# Altium PCB Bluebird_v1.0.PcbDoc
Units mil, origin at the board's own origin, x right, y up, seen from the top; angles counter-clockwise.
Board outline 2755.91 x 2204.72 mil, 4 copper layers (Top Layer, Internal Plane 1, Internal Plane 2, Bottom Layer), stack 30.634 mil thick; 136 components, 80 nets, 678 pads, 161 vias.
Unrouted connection lines stored in the file: 17.
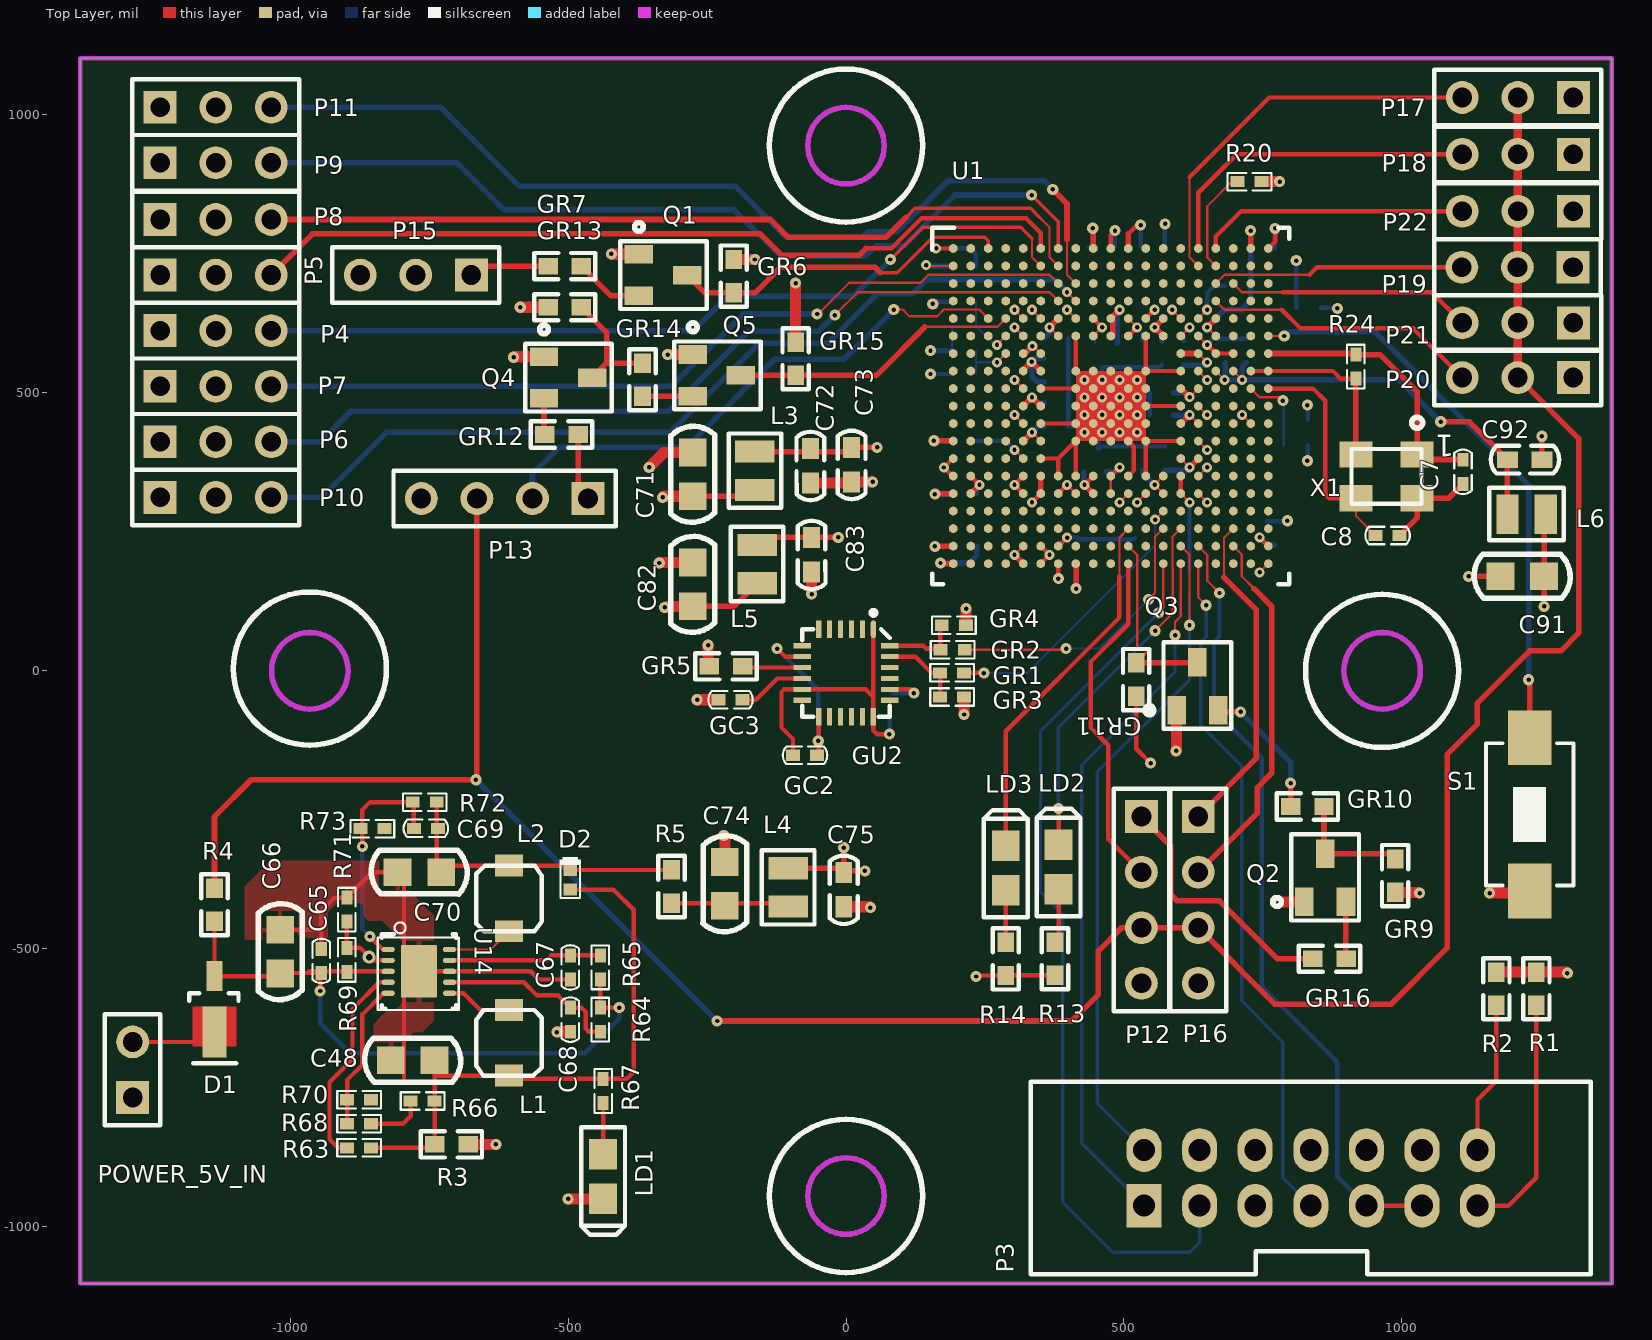
[diagram p0: Top Layer view]
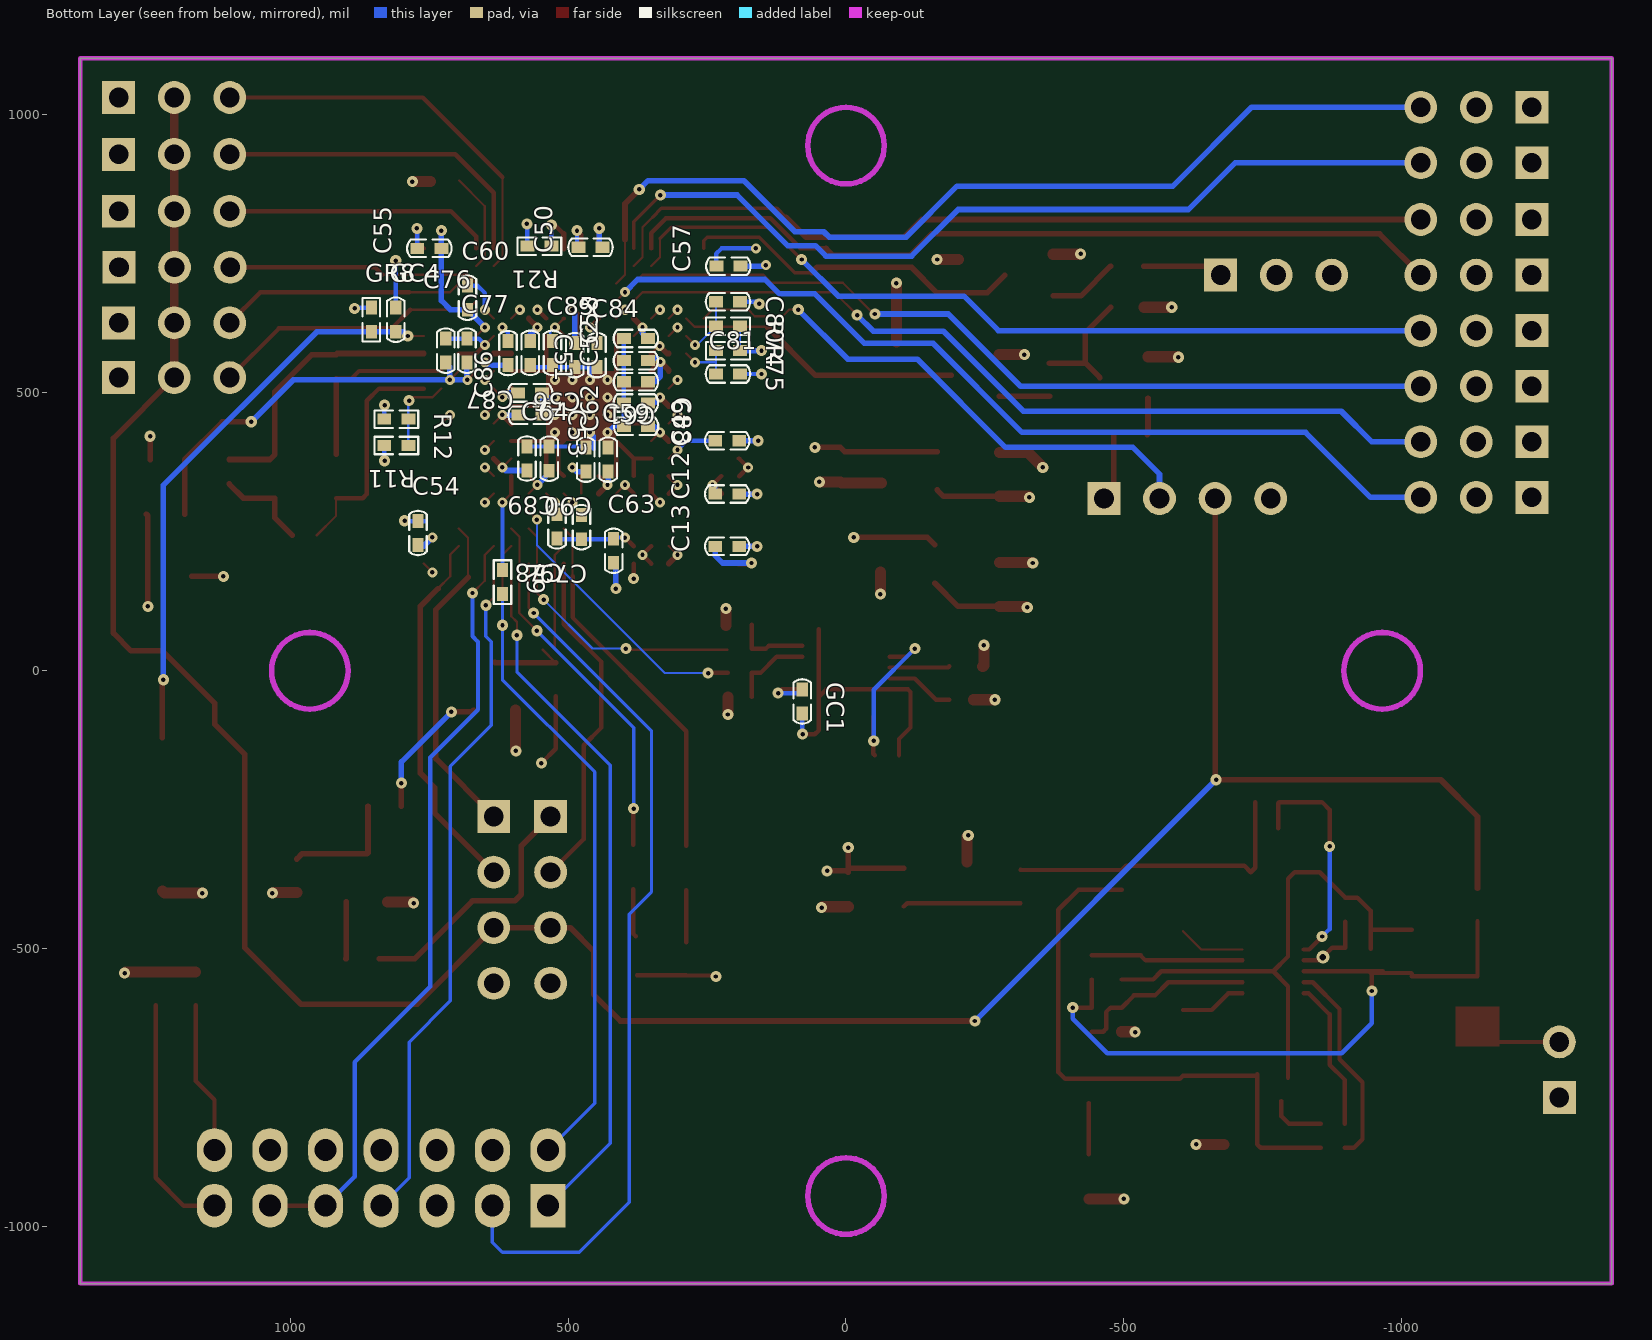
[diagram p1: Bottom Layer view, seen from below]
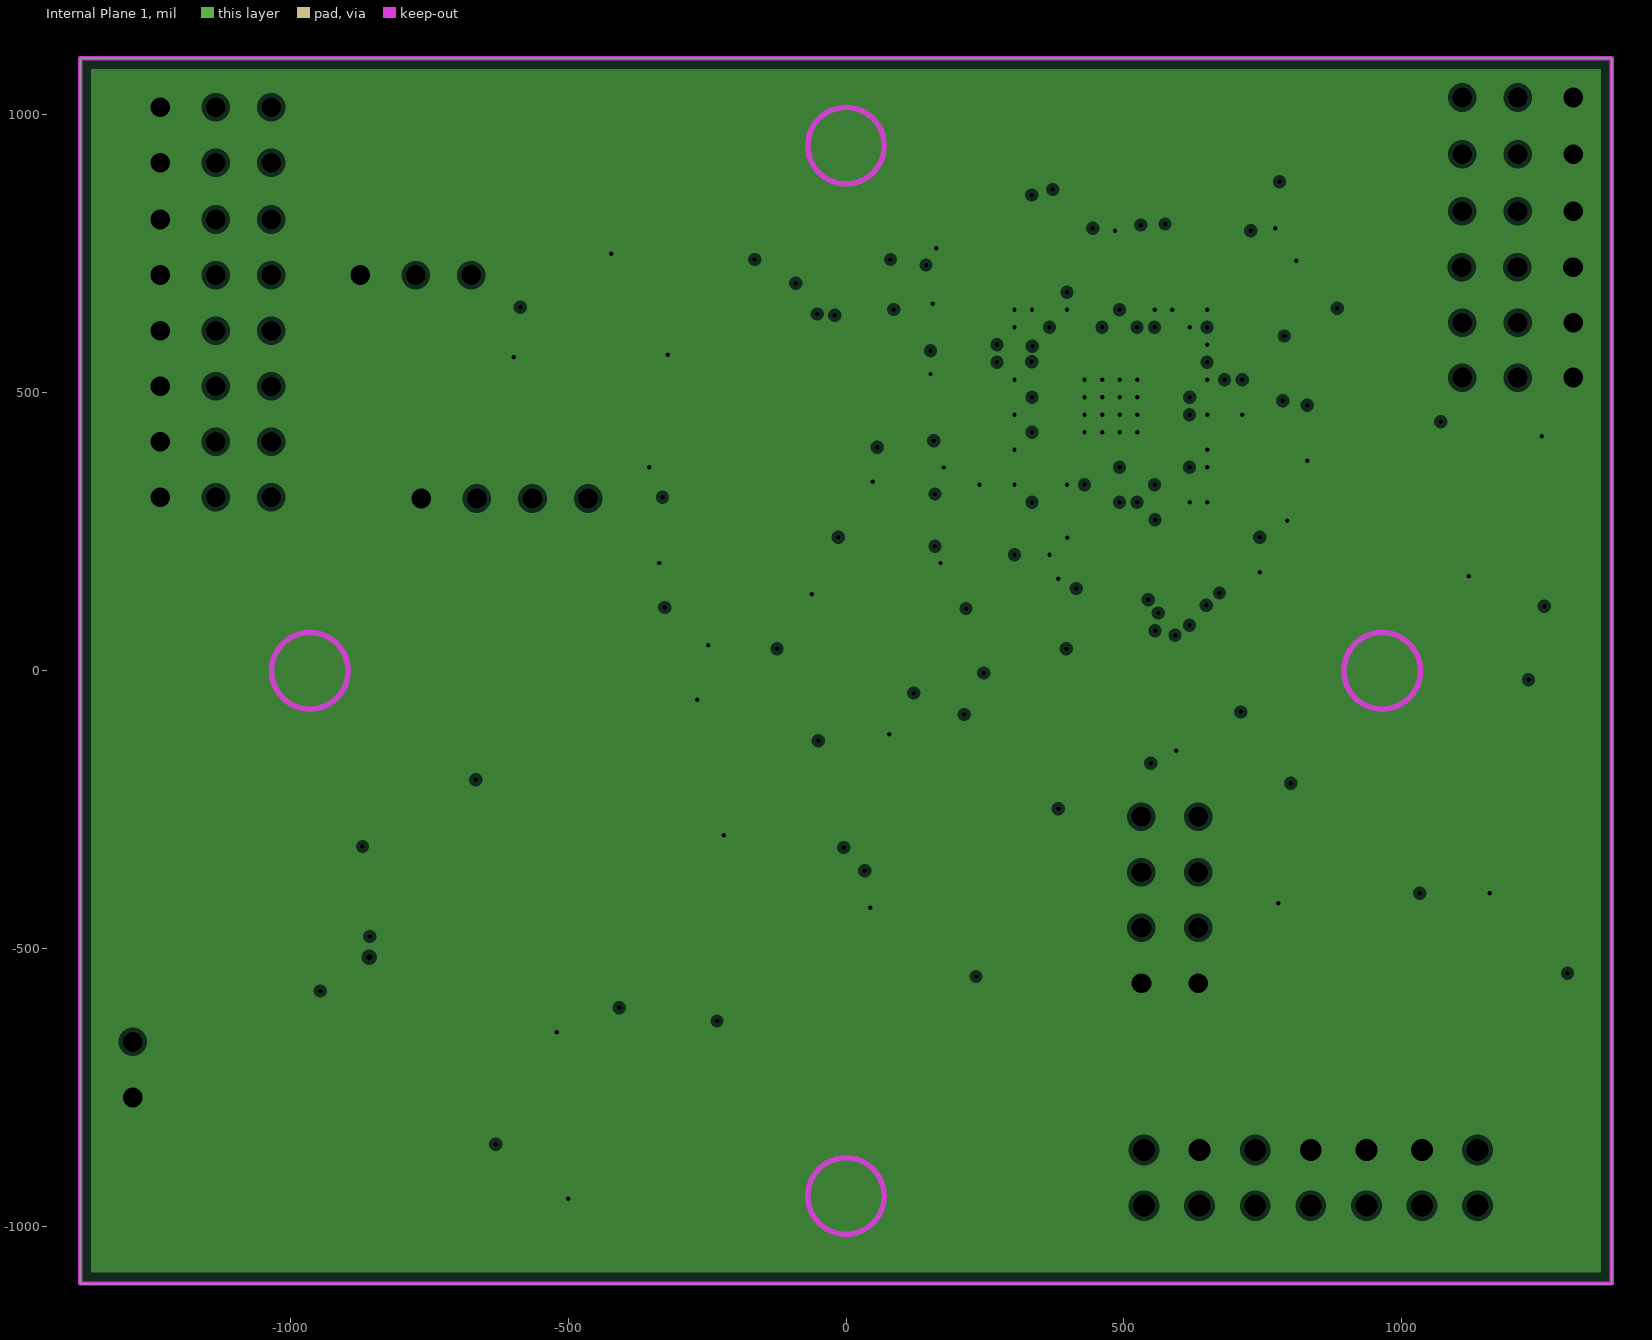
[diagram p2: Internal Plane 1, clearances drawn from the general rule]
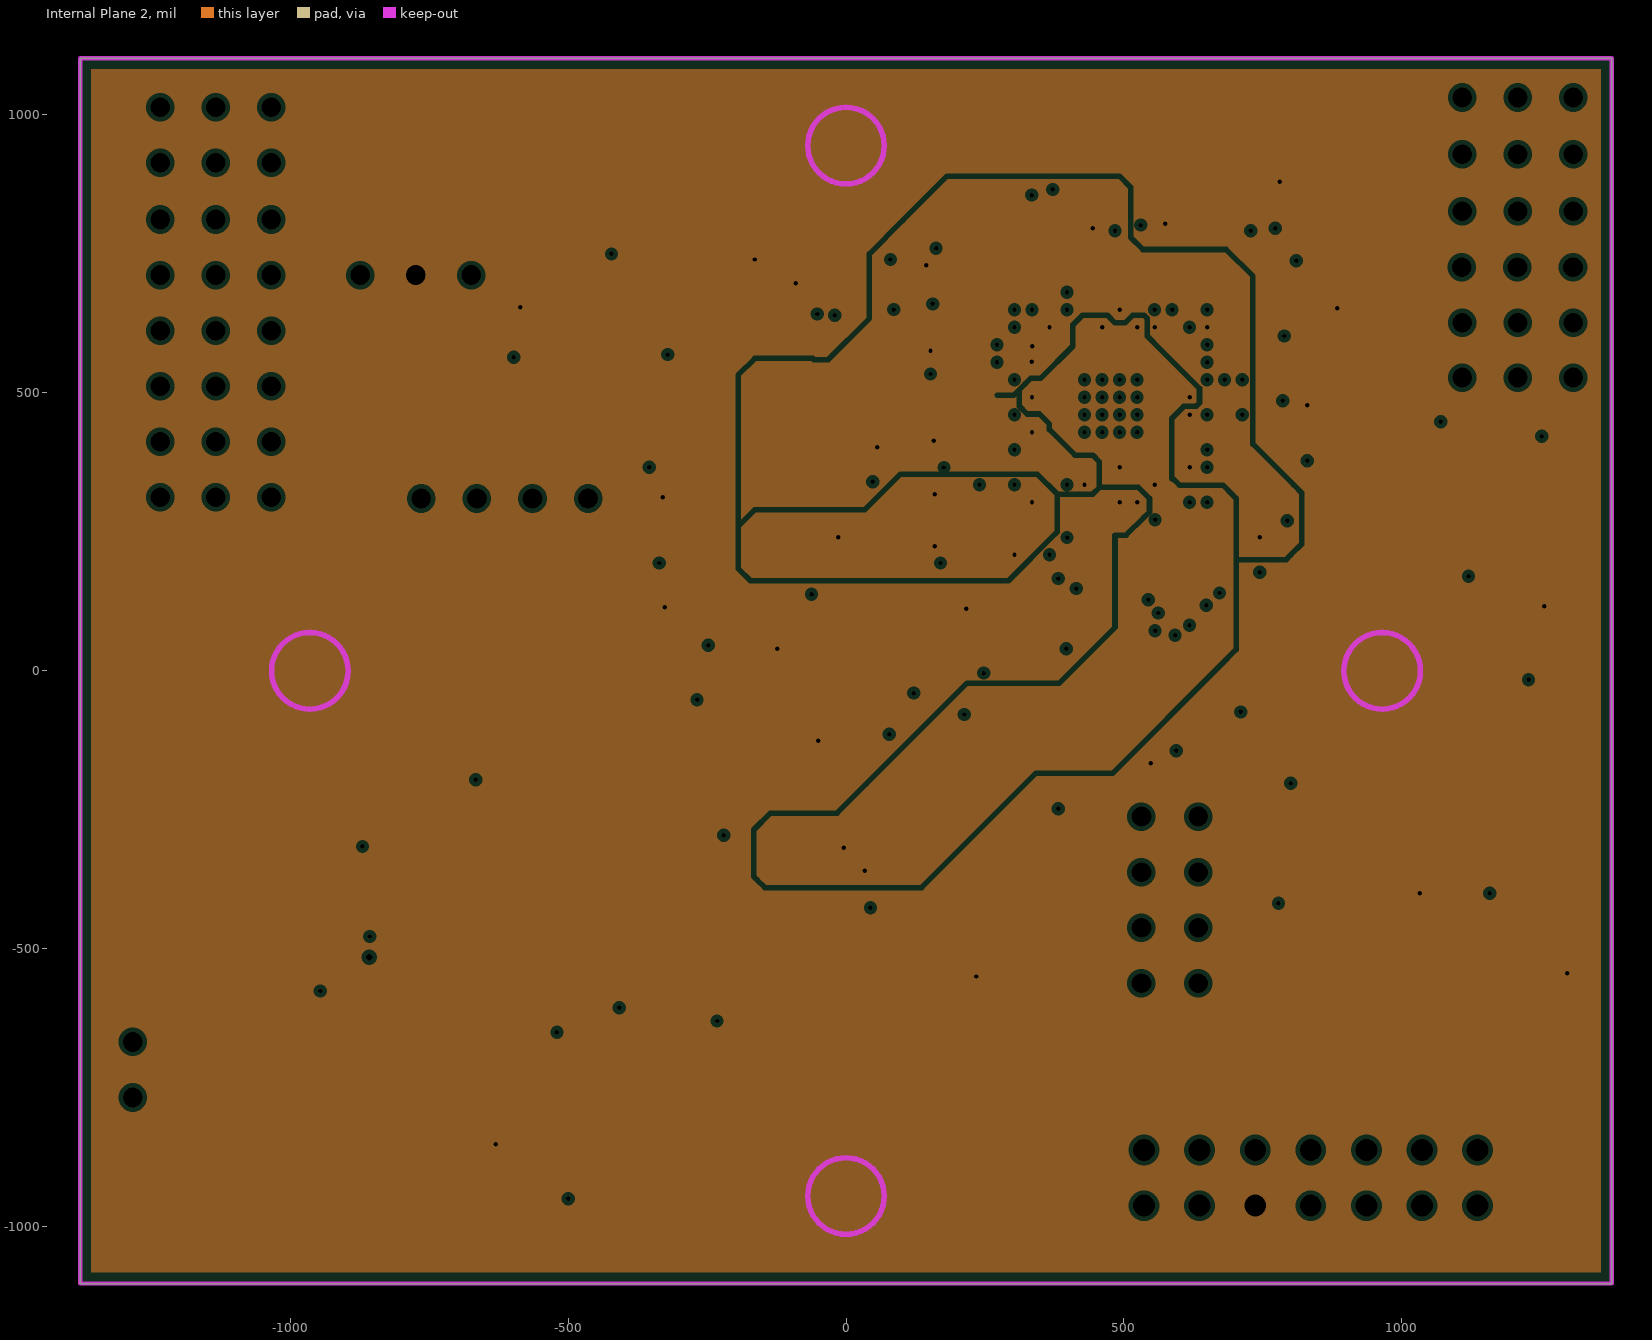
[diagram p3: Internal Plane 2, clearances drawn from the general rule]

## Layer stack, top to bottom
Top Solder: solder mask 0.4, Solder Resist, Dk 3.5
Top Layer: signal copper 1.4
Dielectric 1: core 10, FR-4, Dk 4.2
Internal Plane 1: plane copper 1.417, net GND
Dielectric 3: prepreg 5, Dk 4.2
Internal Plane 2: plane copper 1.417, net (Multiple Nets)
Dielectric 2: core 10, Dk 4.2
Bottom Layer: signal copper 1.4
Bottom Solder: solder mask 0.4, Solder Resist, Dk 3.5

## Board outline
-1377.95,-1102.36 1377.95,-1102.36 1377.95,1102.36 -1377.95,1102.36

## Design rules (kind name [scope] priority, off if disabled: settings)
Clearance [All] p1: gap=5
ComponentClearance [All] p1 off: gap=10 collisioncheckmode=3 verticalgap=10 showdistances=FALSE
PlaneClearance [All] p1: clearance=8
PlaneConnect [All] p1: planeconnectstyle=Relief reliefexpansion=10 reliefentries=4 reliefconductorwidth=8 reliefairgap=8
PolygonConnect [All] p1: connectstyle=Relief reliefconductorwidth=8 reliefentries=4 polygonreliefangle="90 Angle" airgapwidth=8
RoomDefinition Sheet6 [InComponentClass('Sheet6')] p1 off: confinementstyle=ConfineIn formatcopy=TRUE lockcomponents=FALSE outline -3617.95,-2617.68 -1617.95,-2617.68 -1617.95,-1617.68 -3617.95,-1617.68
RoomDefinition Sheet5 [InComponentClass('Sheet5')] p2 off: confinementstyle=ConfineIn formatcopy=TRUE lockcomponents=FALSE outline -3617.95,-2617.68 -1617.95,-2617.68 -1617.95,-1617.68 -3617.95,-1617.68
RoomDefinition Sheet4 [InComponentClass('Sheet4')] p3 off: confinementstyle=ConfineIn formatcopy=TRUE lockcomponents=FALSE outline -3617.95,-2617.68 -1617.95,-2617.68 -1617.95,-1617.68 -3617.95,-1617.68
RoomDefinition Sheet2 [InComponentClass('Sheet2')] p4 off: confinementstyle=ConfineIn formatcopy=TRUE lockcomponents=FALSE outline -3617.95,-2617.68 -1617.95,-2617.68 -1617.95,-1617.68 -3617.95,-1617.68
RoomDefinition Sheet1 [InComponentClass('Sheet1')] p5 off: confinementstyle=ConfineIn formatcopy=TRUE lockcomponents=FALSE outline -3617.95,-2617.68 -1617.95,-2617.68 -1617.95,-1617.68 -3617.95,-1617.68
RoutingVias [All] p1: holewidth=8 width=20 viastyle="Through Hole" minholewidth=8 minwidth=16 maxholewidth=8 maxwidth=20
SilkToSilkClearance [All] p1 off: silktosilkclearance=10
SilkToSolderMaskClearance [IsPad] p1 off: minsilkscreentomaskgap=10 clearancetoexposedcopper=TRUE
SolderMaskExpansion [All] p1: expansion=4
UnpouredPolygon [All] p1: allowunpoured=FALSE
Width [All] p1: maxlimit=39.37 minlimit=4 preferedwidth=10
24 further rules are at their usual default settings.

## Classes and differential pairs
component class Sheet1: C48 C65 C66 C67 C68 C69 C70 C71 C72 C73 C74 C75 C82 C83 C91 C92 D1 D2 L1 L2 L3 L4 L5 L6 LD1 POWER_5V_IN R3 R4 R5 R63 R64 R65 R66 R67 R68 R69 R70 R71 R72 R73 U14
component class Sheet2: C12 C13 C49 C50 C51 C52 C53 C54 C55 C56 C57 C58 C59 C60 C61 C62 C63 C64 C76 C77 C78 C79 C80 C81 C84 C85 C86 C87 C88 C89 C90 R74 R75
component class Sheet4: U1
component class Sheet5: C7 C8 GC4 GR8 P3 R1 R2 R9 R11 R12 R24 S1 X1
component class Sheet6: GC1 GC2 GC3 GR1 GR2 GR3 GR4 GR5 GR6 GR7 GR9 GR10 GR11 GR12 GR13 GR14 GR15 GR16 GU2 LD2 LD3 P4 P5 P6 P7 P8 P9 P10 P11 P12 P13 P15 P16 P17 P18 P19 P20 P21 P22 Q1 Q2 Q3 Q4 Q5 R13 R14 R20 R21

## Components (designator, comment, footprint, x,y, rotation, side; value= is the part's Value field where it differs from the comment)
C7 "C_0805" C/0402 1110,358 r90 top
C8 "C_0805" C/0402 974.41,243.59 r180 top
C12 "C_0805" C/0402 213.65,318 r0 bottom
C13 "C_0805" C/0402 213.65,224 r0 bottom
C48 "C_0603" C/0805/smt1 -818.9,-700.79 r0 top
C49 "C_0805" C/0402 213.65,414 r0 bottom
C50 "C_0805" C/0402 459.65,762 r0 bottom
C51 "C_0805" C/0402 568,572 r270 bottom
C52 "C_0805" C/0402 378,558 r0 bottom
C53 "C_0805" C/0402 567.65,460 r180 bottom
C54 "C_0805" C/0402 770,248 r90 bottom
C55 "C_0805" C/0402 749.65,760 r0 bottom
C56 "C_0805" C/0402 488,568 r270 bottom
C57 "C_0805" C/0402 211.65,728 r0 bottom
C58 "C_0805" C/0402 378,598 r0 bottom
C59 "C_0805" C/0402 428,380 r90 bottom
C60 "C_0805" C/0402 681.1,671.26 r90 bottom
C61 "C_0805" C/0402 378,520 r0 bottom
C62 "C_0805" C/0402 377.65,440 r0 bottom
C63 "C_0805" C/0402 418,216 r90 bottom
C64 "C_0805" C/0402 574,382 r90 bottom
C65 "C_0805" C/0402 -944,-522 r270 top
C66 "C_0805" C/0805/SMT1 -1018,-466 r270 top
C67 "C_0805" C/0402 -496,-533.65 r90 top
C68 "C_0805" C/0402 -496,-627.65 r90 top
C69 "C_0805" C/0402 -755.91,-283.46 r0 top
C70 "C_0805" C/0805/SMT1 -807.09,-362.2 r0 top
C71 "C_0805" C/0805/SMT1 -276,392.74 r270 top
C72 "C_0805" C/0603 -63.94,368.52 r90 top
C73 "C_0805" C/0603 10.06,370.52 r90 top
C74 "C_0805" C/0805/SMT1 -218,-344 r270 top
C75 "C_0805" C/0603 -4,-394 r90 top
C76 "C_0805" C/0402 720,576 r90 bottom
C77 "C_0805" C/0402 682,576 r90 bottom
C78 "C_0805" C/0402 520,260 r270 bottom
C79 "C_0805" C/0402 476,258.35 r270 bottom
C80 "C_0805" C/0402 212.35,664 r180 bottom
C81 "C_0805" C/0402 212.35,534 r180 bottom
C82 "C_0805" C/0805/SMT1 -276,194.74 r270 top
C83 "C_0805" C/0603 -61.94,208.52 r90 top
C84 "C_0805" C/0402 448,568 r90 bottom
C85 "C_0805" C/0402 528,572 r90 bottom
C86 "C_0805" C/0402 568.35,500 r0 bottom
C87 "C_0805" C/0402 608,571.65 r270 bottom
C88 "C_0805" C/0402 378,482 r180 bottom
C89 "C_0805" C/0402 534,381.65 r270 bottom
C90 "C_0805" C/0402 468,380 r270 bottom
C91 "C_0805" C/0805/SMT1 1177.26,170 r0 top
C92 "C_0805" C/0603 1221.48,380.06 r180 top
D1 "MBRM110ET1G" DO-216AA -1136.17,-604.36 r90 top
D2 "CFSH05-20L TR" SOD-882L -496.06,-377.95 r270 top
GC1 "C_0805" C/0402 78.74,-55.12 r270 bottom
GC2 "C_0805" C/0402 -73.65,-152 r0 top
GC3 "C_0805" C/0402 -207.65,-52 r180 top
GC4 "C_0805" C/0402 810,631.65 r90 bottom
GR1 "R_0402" R/0402 190.95,-3.75 r0 top
GR2 "R_0402" R/0402 192,38 r0 top
GR3 "R_0402" R/0402 190.95,-47.06 r0 top
GR4 "R_0402" R/0402 194,82 r0 top
GR5 "R_0402" R/0603 -216,8 r180 top
GR6 "R_0402" R/0603 -202,710 r90 top
GR7 "R_0402" R/0603 -506,728 r180 top
GR8 "R_0402" R/0402 854,631.65 r90 bottom
GR9 "R_0402" R/0603 987.94,-368.52 r270 top
GR10 "R_0402" R/0603 830,-244 r0 top
GR11 "R_0402" R/0603 522,-15.81 r270 top
GR12 "R_0402" R/0603 -511.81,425.2 r0 top
GR13 "R_0402" R/0603 -506,654 r180 top
GR14 "R_0402" R/0603 -366.14,523.62 r90 top
GR15 "R_0402" R/0603 -90.55,561.5 r90 top
GR16 "R_0402" R/0603 869.83,-518.13 r180 top
GU2 "MPU6050" IC-QFN24-RGE4X4 0,-3.94 r270 top
L1 "VLF3010AT-2R2M1R0" Inductor-VLF3010A -606.3,-669.29 r270 top
L2 "VLF3010AT-3R3MR87" Inductor-VLF3010A -606.3,-409.45 r90 top
L3 "BLM21PG221SN1D" L0805 -164,360 r0 top
L4 "BLM21PG221SN1D" L0805 -104,-389.55 r0 top
L5 "BKP2125HS600-T" L0805 -160,192 r0 top
L6 "BKP2125HS600-T" l0805 1224.45,282 r90 top
LD1 "LED_Lights" LED0805 -437.01,-910.08 r270 top
LD2 "LED_Lights" LED0805 382.48,-352.72 r90 top
LD3 "LED_Lights" LED0805 287.4,-354.96 r90 top
P3 "JTAG" JTAG 836.22,-912.2 r180 top
P4 "PWM_CH8" HDR1X3 -1234,612 r0 top
P5 "PWM_CH7" HDR1X3 -1234,712 r0 top
P6 "PWM_CH6" HDR1X3 -1234,412 r0 top
P7 "PWM_CH5" HDR1X3 -1234,512 r0 top
P8 "PWM_CH4" HDR1X3 -1234,812 r0 top
P9 "PWM_CH3" HDR1X3 -1234,914 r0 top
P10 "PWM_CH2" HDR1X3 -1234,312 r0 top
P11 "PWM_CH1" HDR1X3 -1234,1014 r0 top
P12 "UART1" HDR1X4 531.5,-262.2 r270 top
P13 "UART2" HDR1X4 -464,310 r180 top
P15 "SBUS" HDR1X3 -674,712 r180 top
P16 "I2CB" HDR1X4 633.86,-262.2 r270 top
P17 "RC_CH6" HDR1X3 1308.66,1031.5 r180 top
P18 "RC_CH5" HDR1X3 1308.66,929.13 r180 top
P19 "RC-CH4" HDR1X3 1308,726 r180 top
P20 "RC_CH3" HDR1X3 1308.66,527.56 r180 top
P21 "RC_CH2" HDR1X3 1308.66,625.98 r180 top
P22 "RC_CH1" HDR1X3 1308.66,826.77 r180 top
POWER_5V_IN "Header 2" HDR1X2 -1283.46,-767.72 r90 top
Q1 "S8050" SOT23-3P -329.31,712 r270 top
Q2 "S8050" SOT23-3P 861.95,-372.46 r0 top
Q3 "S8050" SOT23-3P 632.24,-27.62 r0 top
Q4 "S8050" SOT23-3P -500,527.56 r270 top
Q5 "S8050" SOT23-3P -232.28,531.5 r270 top
R1 "R_0402" R/0603 1242,-572 r270 top
R2 "R_0402" R/0603 1170,-572 r270 top
R3 "R_0402" R/0603 -710,-852 r180 top
R4 "R_0402" R/0603 -1136.17,-420.82 r90 top
R5 "R_0402" R/0603 -314,-388 r270 top
R9 "R_0402" R/0402 618,159.65 r270 bottom
R11 "R_0402" R/0402 809.06,405.51 r0 bottom
R12 "R_0402" R/0402 809.06,452.76 r180 bottom
R13 "R_0402" R/0603 376,-518 r270 top
R14 "R_0402" R/0603 287.4,-518.19 r270 top
R20 "R_0402" R/0402 726,880 r0 top
R21 "R_0402" R/0402 551.65,764 r0 bottom
R24 "R_0402" R/0402 917.32,547.24 r270 top
R63 "R_0402" R/0402 -875.98,-858.27 r0 top
R64 "R_0402" R/0402 -442,-627.65 r270 top
R65 "R_0402" R/0402 -442,-533.65 r90 top
R66 "R_0402" R/0402 -761.65,-774 r0 top
R67 "R_0402" R/0402 -437.01,-755.91 r90 top
R68 "R_0402" R/0402 -875.98,-814.96 r0 top
R69 "R_0402" R/0402 -898,-520 r90 top
R70 "R_0402" R/0402 -875.98,-771.65 r0 top
R71 "R_0402" R/0402 -898,-429.65 r90 top
R72 "R_0402" R/0402 -757.87,-236.22 r0 top
R73 "R_0402" R/0402 -852,-284 r0 top
R74 "R_0402" R/0402 212.35,620 r180 bottom
R75 "R_0402" R/0402 212.35,576 r180 bottom
S1 "SW-PB" SW_PB2_A1 1230,-256 r180 top
U1 "TMS320F28379DZWTT" ZWT0337A 476.38,476.38 r0 top
U14 "TPS62420DRC" DRC0010J -768.49,-540.68 r0 top
X1 "20MHz" XIAL4P-SMT3*2X5 972.44,349.89 r180 top

## Footprints (in the part's own frame and the unit in brackets; to place one, negate y for a bottom-side part, rotate by r counter-clockwise, add the part's x,y. Pads: shape width x height; smd on the part's side, far side on the other; paste and mask are expansions set on the pad)
C/0402 [mil]
  rect 25x20 smd: 1(-21.65,0) 2(21.65,0)
  silkscreen extent -40,-16 40,16
C/0603 [mil]
  rect 38x30 smd: 1(-30.52,0.06) 2(31.48,0.06)
  silkscreen extent -62,-25 62,25
C/0805/smt1 [mm]
  rect 1.27x1.25 smd: 1(0,0) 2(2,0)
  silkscreen extent -1.19,-1 3.19,1.01
C/0805/SMT1 [mm]
  rect 1.27x1.25 smd: 1(0,0) 2(2,0)
  silkscreen extent -1.19,-1 3.19,1.01
DO-216AA [mm] "ST Microelectronics"
  rect 2.32x1.1 smd: 1(-1.16,0)
  rect 1.38x0.75 smd: 2(1.4,0)
  Top Layer region: -1.82,-1.015 0,-1.015 0,1.015 -1.82,1.015
  silkscreen extent -2.58,-1.1 0.63,1.15, body extent -2,-1 1.85,1, height 1.01
DRC0010J [mm] "SON, 10-Leads, Body 3x3mm, Pitch 0.5mm, Thermal Pad 2.4x1.65mm, TI Recommended"
  rrect100% 0.6x0.24 smd: 1(-1.4,1) 2(-1.4,0.5) 3(-1.4,0) 4(-1.4,-0.5) 5(-1.4,-1) 6(1.4,-1) 7(1.4,-0.5) 8(1.4,0) 9(1.4,0.5) 10(1.4,1)
  rrect6% 1.65x2.4 smd paste-0.825: 11(0,0)
  silkscreen extent -1.88,-1.77 1.82,2.24, body extent -1.55,-1.55 1.55,1.55, height 1.01
HDR1X2 [mm] "Connector; Header; 2 Position"
  rect 1.5x1.5 hole 0.9: 1(0,0)
  round 1.5 hole 0.9: 2(2.54,0)
  silkscreen extent -1.27,-1.27 3.81,1.27
HDR1X3 [mm] "Connector; Header; 3 Position"
  rect 1.5x1.5 hole 0.9: 1(0,0)
  round 1.5 hole 0.9: 2(2.54,0) 3(5.08,0)
  silkscreen extent -1.27,-1.27 6.35,1.27
HDR1X4 [mm] "Connector; Header; 4 Position"
  rect 1.5x1.5 hole 0.9: 1(0,0)
  round 1.5 hole 0.9: 2(2.54,0) 3(5.08,0) 4(7.62,0)
  silkscreen extent -1.27,-1.27 8.89,1.27
IC-QFN24-RGE4X4 [mm]
  oval 0.8x0.24 smd: 1(-2,1.25)
  rect 0.8x0.24 smd: 2(-2,0.75) 3(-2,0.25) 4(-2,-0.25) 5(-2,-0.75) 6(-2,-1.25) 13(2,-1.25) 14(2,-0.75) 15(2,-0.25) 16(2,0.25) 17(2,0.75) 18(2,1.25)
  rect 0.24x0.8 smd: 7(-1.25,-2) 8(-0.75,-2) 9(-0.25,-2) 10(0.25,-2) 11(0.75,-2) 12(1.25,-2) 19(1.25,2) 20(0.75,2) 21(0.25,2) 22(-0.25,2) 23(-0.75,2) 24(-1.25,2)
  silkscreen extent -2.85,-2 2,2
Inductor-VLF3010A [mm]
  rect 1x1.3 smd: 1(-1.5,0) 2(1.5,0)
  silkscreen extent -1.5,-1.5 1.5,1.5
JTAG [mm]
  rect 1.6x2 hole 1: 1(7.62,1.27)
  oval 1.6x2 hole 1: 2(7.62,-1.27) 3(5.08,1.27) 4(5.08,-1.27) 5(2.54,1.27) 6(2.54,-1.27) 7(0,1.27) 8(0,-1.27) 9(-2.54,1.27) 10(-2.54,-1.27) 11(-5.08,1.27) 12(-5.08,-1.27) 13(-7.62,1.27) 14(-7.62,-1.27)
  silkscreen extent -12.8,-4.4 12.8,4.4
L0805 [mm]
  rect 1.8x1.016 smd: 1(0,-0.875) 2(0,0.875)
  silkscreen extent -1.2,-1.7 1.2,1.7
l0805 [mm]
  rect 1.8x1.016 smd: 1(0,-0.875) 2(0,0.875)
  silkscreen extent -1.2,-1.7 1.2,1.7
LED0805 [mil]
  rect 55x50 smd: 1(-40,0) 2(40,0)
  silkscreen extent -89,-39 104,39
R/0402 [mil]
  rect 25x20 smd: 1(-21.65,0) 2(21.65,0)
  silkscreen extent -39,-16 39,16
R/0603 [mil]
  rect 35x30 smd: 1(-30,0) 2(30,0)
  silkscreen extent -55,-24 55,24
SOD-882L [mm] "Central Semiconductor"
  rect 0.55x0.6 smd: 1(-0.5,0)
  rect 0.55x0.6 smd paste-0.05: 2(0.4,0)
  silkscreen extent -1.1,-0.5 0.77,0.5, body extent -0.52,-0.32 0.52,0.32, height 0.41
SOT23-3P [mm]
  rect 0.85x1.3 smd: 1(-0.953,-1.1) 2(0.953,-1.1) 3(0,1.1)
  silkscreen extent -2.4,-1.95 1.55,2
SW_PB2_A1 [mm]
  rect 2x2.5 smd: 1(0,3.556) 2(0,-3.444)
  silkscreen extent -2,-3.19 2,3.31, body extent -2.03,-3.18 2.03,3.3, height 1.2
XIAL4P-SMT3*2X5 [mm]
  rect 1.5x1.2 smd: 1(-1.4,-1) 2(1.4,-1) 3(1.4,1) 4(-1.4,1)
  silkscreen extent -1.65,-2.7 1.6,1.25
ZWT0337A [mm] "BGA, 337-Leads, Body 16x16mmx1.4mm, Pitch 0.80mm"
  round 0.4 smd paste+0 mask+0.051: A1(-7.2,7.2) A2(-6.4,7.2) A3(-5.6,7.2) A4(-4.8,7.2) A5(-4,7.2) A6(-3.2,7.2) A7(-2.4,7.2) A8(-1.6,7.2) A9(-0.8,7.2) A10(0,7.2) A11(0.8,7.2) A12(1.6,7.2) A13(2.4,7.2) A14(3.2,7.2) A15(4,7.2) A16(4.8,7.2) A17(5.6,7.2) A18(6.4,7.2) A19(7.2,7.2) B1(-7.2,6.4) B2(-6.4,6.4) B3(-5.6,6.4) B4(-4.8,6.4) B5(-4,6.4) B6(-3.2,6.4) B7(-2.4,6.4) B8(-1.6,6.4) B9(-0.8,6.4) B10(0,6.4) B11(0.8,6.4) B12(1.6,6.4) B13(2.4,6.4) B14(3.2,6.4) B15(4,6.4) B16(4.8,6.4) B17(5.6,6.4) B18(6.4,6.4) B19(7.2,6.4) C1(-7.2,5.6) C2(-6.4,5.6) C3(-5.6,5.6) C4(-4.8,5.6) C5(-4,5.6) C6(-3.2,5.6) C7(-2.4,5.6) C8(-1.6,5.6) C9(-0.8,5.6) C10(0,5.6) C11(0.8,5.6) C12(1.6,5.6) C13(2.4,5.6) C14(3.2,5.6) C15(4,5.6) C16(4.8,5.6) C17(5.6,5.6) C18(6.4,5.6) C19(7.2,5.6) D1(-7.2,4.8) D2(-6.4,4.8) D3(-5.6,4.8) D4(-4.8,4.8) D5(-4,4.8) D6(-3.2,4.8) D7(-2.4,4.8) D8(-1.6,4.8) D9(-0.8,4.8) D10(0,4.8) D11(0.8,4.8) D12(1.6,4.8) D13(2.4,4.8) D14(3.2,4.8) D15(4,4.8) D16(4.8,4.8) D17(5.6,4.8) D18(6.4,4.8) D19(7.2,4.8) E1(-7.2,4) E2(-6.4,4) E3(-5.6,4) E4(-4.8,4) E5(-4,4) E6(-3.2,4) E7(-2.4,4) E8(-1.6,4) E9(-0.8,4) E10(0,4) E11(0.8,4) E12(1.6,4) E13(2.4,4) E14(3.2,4) E15(4,4) E16(4.8,4) E17(5.6,4) E18(6.4,4) E19(7.2,4) F1(-7.2,3.2) F2(-6.4,3.2) F3(-5.6,3.2) F4(-4.8,3.2) F5(-4,3.2) F6(-3.2,3.2) F7(-2.4,3.2) F8(-1.6,3.2) F9(-0.8,3.2) F10(0,3.2) F11(0.8,3.2) F12(1.6,3.2) F13(2.4,3.2) F14(3.2,3.2) F15(4,3.2) F16(4.8,3.2) F17(5.6,3.2) F18(6.4,3.2) F19(7.2,3.2) G1(-7.2,2.4) G2(-6.4,2.4) G3(-5.6,2.4) G4(-4.8,2.4) G5(-4,2.4) G6(-3.2,2.4) G14(3.2,2.4) G15(4,2.4) G16(4.8,2.4) G17(5.6,2.4) G18(6.4,2.4) G19(7.2,2.4) H1(-7.2,1.6) H2(-6.4,1.6) H3(-5.6,1.6) H4(-4.8,1.6) H5(-4,1.6) H6(-3.2,1.6) H8(-1.6,1.6) H9(-0.8,1.6) H10(0,1.6) H11(0.8,1.6) H12(1.6,1.6) H14(3.2,1.6) H15(4,1.6) H16(4.8,1.6) H17(5.6,1.6) H18(6.4,1.6) H19(7.2,1.6) J1(-7.2,0.8) J2(-6.4,0.8) J3(-5.6,0.8) J4(-4.8,0.8) J5(-4,0.8) J6(-3.2,0.8) J8(-1.6,0.8) J9(-0.8,0.8) J10(0,0.8) J11(0.8,0.8) J12(1.6,0.8) J14(3.2,0.8) J15(4,0.8) J16(4.8,0.8) J17(5.6,0.8) J18(6.4,0.8) J19(7.2,0.8) K1(-7.2,0) K2(-6.4,0) K3(-5.6,0) K4(-4.8,0) K5(-4,0) K6(-3.2,0) K8(-1.6,0) K9(-0.8,0) K10(0,0) K11(0.8,0) K12(1.6,0) K14(3.2,0) K15(4,0) K16(4.8,0) K17(5.6,0) K18(6.4,0) K19(7.2,0) L1(-7.2,-0.8) L2(-6.4,-0.8) L3(-5.6,-0.8) L4(-4.8,-0.8) L5(-4,-0.8) L6(-3.2,-0.8) L8(-1.6,-0.8) L9(-0.8,-0.8) L10(0,-0.8) L11(0.8,-0.8) L12(1.6,-0.8) L14(3.2,-0.8) L15(4,-0.8) L16(4.8,-0.8) L17(5.6,-0.8) L18(6.4,-0.8) L19(7.2,-0.8) M1(-7.2,-1.6) M2(-6.4,-1.6) M3(-5.6,-1.6) M4(-4.8,-1.6) M5(-4,-1.6) M6(-3.2,-1.6) M8(-1.6,-1.6) M9(-0.8,-1.6) M10(0,-1.6) M11(0.8,-1.6) M12(1.6,-1.6) M14(3.2,-1.6) M15(4,-1.6) M16(4.8,-1.6) M17(5.6,-1.6) M18(6.4,-1.6) M19(7.2,-1.6) N1(-7.2,-2.4) N2(-6.4,-2.4) N3(-5.6,-2.4) N4(-4.8,-2.4) N5(-4,-2.4) N6(-3.2,-2.4) N14(3.2,-2.4) N15(4,-2.4) N16(4.8,-2.4) N17(5.6,-2.4) N18(6.4,-2.4) N19(7.2,-2.4) P1(-7.2,-3.2) P2(-6.4,-3.2) P3(-5.6,-3.2) P4(-4.8,-3.2) P5(-4,-3.2) P6(-3.2,-3.2) P7(-2.4,-3.2) P8(-1.6,-3.2) P9(-0.8,-3.2) P10(0,-3.2) P11(0.8,-3.2) P12(1.6,-3.2) P13(2.4,-3.2) P14(3.2,-3.2) P15(4,-3.2) P16(4.8,-3.2) P17(5.6,-3.2) P18(6.4,-3.2) P19(7.2,-3.2) R1(-7.2,-4) R2(-6.4,-4) R3(-5.6,-4) R4(-4.8,-4) R5(-4,-4) R6(-3.2,-4) R7(-2.4,-4) R8(-1.6,-4) R9(-0.8,-4) R10(0,-4) R11(0.8,-4) R12(1.6,-4) R13(2.4,-4) R14(3.2,-4) R15(4,-4) R16(4.8,-4) R17(5.6,-4) R18(6.4,-4) R19(7.2,-4) T1(-7.2,-4.8) T2(-6.4,-4.8) T3(-5.6,-4.8) T4(-4.8,-4.8) T5(-4,-4.8) T6(-3.2,-4.8) T7(-2.4,-4.8) T8(-1.6,-4.8) T9(-0.8,-4.8) T10(0,-4.8) T11(0.8,-4.8) T12(1.6,-4.8) T13(2.4,-4.8) T14(3.2,-4.8) T15(4,-4.8) T16(4.8,-4.8) T17(5.6,-4.8) T18(6.4,-4.8) T19(7.2,-4.8) U1(-7.2,-5.6) U2(-6.4,-5.6) U3(-5.6,-5.6) U4(-4.8,-5.6) U5(-4,-5.6) U6(-3.2,-5.6) U7(-2.4,-5.6) U8(-1.6,-5.6) U9(-0.8,-5.6) U10(0,-5.6) U11(0.8,-5.6) U12(1.6,-5.6) U13(2.4,-5.6) U14(3.2,-5.6) U15(4,-5.6) U16(4.8,-5.6) U17(5.6,-5.6) U18(6.4,-5.6) U19(7.2,-5.6) V1(-7.2,-6.4) V2(-6.4,-6.4) V3(-5.6,-6.4) V4(-4.8,-6.4) V5(-4,-6.4) V6(-3.2,-6.4) V7(-2.4,-6.4) V8(-1.6,-6.4) V9(-0.8,-6.4) V10(0,-6.4) V11(0.8,-6.4) V12(1.6,-6.4) V13(2.4,-6.4) V14(3.2,-6.4) V15(4,-6.4) V16(4.8,-6.4) V17(5.6,-6.4) V18(6.4,-6.4) V19(7.2,-6.4) W1(-7.2,-7.2) W2(-6.4,-7.2) W3(-5.6,-7.2) W4(-4.8,-7.2) W5(-4,-7.2) W6(-3.2,-7.2) W7(-2.4,-7.2) W8(-1.6,-7.2) W9(-0.8,-7.2) W10(0,-7.2) W11(0.8,-7.2) W12(1.6,-7.2) W13(2.4,-7.2) W14(3.2,-7.2) W15(4,-7.2) W16(4.8,-7.2) W17(5.6,-7.2) W18(6.4,-7.2) W19(7.2,-7.2)
  silkscreen extent -8.15,-8.15 8.15,8.15

## Part data
D1 D2: library part DIODE_SOD123
L1 L2: library part L_SMD_7
L3 L4 L5 L6: library part L_0603
P3: library part "Header 7X2", "Header, 7-Pin, Dual row"
P4 P5 P6 P7 P8 P9 P10 P11 P15 P17 P18 P19 P20 P21 P22: library part "Header 3", "Header, 3-Pin"
P12 P13 P16: library part "Header 4", "Header, 4-Pin"
POWER_5V_IN: "Header, 2-Pin"
Q1: "NPN三极管"
Q2 Q3 Q4 Q5: "NPNèy??1ü"
S1: "微动开关"
U1: "Imported"
X1: library part OSC

## Via types
v1: diameter 20, hole 8, Top Layer to Bottom Layer, 88 vias
v2: diameter 18, hole 8, Top Layer to Bottom Layer, 72 vias
v3: diameter 23.62, hole 11.81, Top Layer to Bottom Layer, 1 vias

## Nets (pads, with @x,y where several pads share a name; then routed paths per layer and width w, separated by ;. In a path a pad name is that pad's centre, name@x,y a point inside that pad or via, vN(x,y) a via of type N, cw(c..) or ccw(c..) an arc to the next point about the centre after c; other vN are vias at no path point)
GND: C12.2 C13.2 C48.1 C49.2 C50.2 C51.2 C52.2 C53.2 C54.2 C55.2 C56.2 C57.2 C58.2 C59.2 C60.2 C61.2 C62.2 C63.2 C64.2 C65.1 C66.1 C67.1 C68.1 C70.1 C71.1 C72.1 C73.1 C74.1 C75.1 C76.2 C77.2 C78.2 C79.2 C80.2 C81.2 C82.1 C83.1 C84.1 C85.1 C86.1 C87.1 C88.1 C89.1 C90.1 C91.1 C92.1 GC1.2 GC2.1 GC3.2 GC4.2 GR5.2 GU2.1 GU2.11 GU2.18 LD1.2 P3.4 P3.8 P3.10 P3.12 P4.1 P5.1 P6.1 P7.1 P8.1 P9.1 P10.1 P11.1 P12.4 P13.4 P15.3 P16.4 P17.1 P18.1 P19.1 P20.1 P21.1 P22.1 POWER_5V_IN.1 Q1.1 Q2.1 Q3.1 Q4.1 Q5.1 R9.1 R11.2 R70.2 R71.2 R73.2 S1.1 U1.A1 U1.A10 U1.A19 U1.E5 U1.E6 U1.E8 U1.E12 U1.E14 U1.E15 U1.F5 U1.F6 U1.F8 U1.F12 U1.F14 U1.F15 U1.G16 U1.G17 U1.H8 U1.H9 U1.H10 U1.H11 U1.H12 U1.H14 U1.H15 U1.J5 U1.J6 U1.J8 U1.J9 U1.J10 U1.J11 U1.J12 U1.K8 U1.K9 U1.K10 U1.K11 U1.K12 U1.K14 U1.K15 U1.L5 U1.L6 U1.L8 U1.L9 U1.L10 U1.L11 U1.L12 U1.L18 U1.M8 U1.M9 U1.M10 U1.M11 U1.M12 U1.M14 U1.M15 U1.N1 U1.N5 U1.N6 U1.P1 U1.P2 U1.P5 U1.P7 U1.P8 U1.P11 U1.P12 U1.P14 U1.P15 U1.R2 U1.R5 U1.R7 U1.R8 U1.R14 U1.R15 U1.V6 U1.V7 U1.W1 U1.W6 U1.W7 U1.W19 U14.8 U14.11 | length 5752
  Top Layer w4: v2(303.15,397.64) U1.N5 ; v2(303.15,460.63) U1.L5 ; v2(303.15,523.62) U1.J5 ; v2(303.15,618.11) U1.F5 ; v2(303.15,649.61) U1.E5 ; v2(334.65,649.61) U1.E6 ; v2(397.64,334.65) U1.R8 ; v2(397.64,649.61) U1.E8 ; v2(586.61,649.61) U1.E14 ; U1.R14 v2(618.11,303.15) ; U1.F14 v2(618.11,618.11) ; U1.R15 v2(649.61,303.15) ; U1.P15 v2(649.61,366.14) ; U1.M15 v2(649.61,397.64) ; U1.K15 v2(649.61,460.63) ; U1.H15 v2(649.61,523.62) ; U1.F15 v2(649.61,586.61) ; U1.E15 v2(649.61,649.61) ; v2(712.6,460.63) U1.L18 ; v2(744.09,177.17) U1.W19
  Top Layer w7.87: C66.1 -944.17,-466 -944,-466.17 ; C65.1 -944,-466.17 ; -795.28,-732.28 -795.28,-567.47 U14.11 ; C67.1 -552.69,-555.31 -567.32,-540.68 U14.8 U14.11 ; GC2.1 -95.31,-122.69 -116,-102 -116,-38 -111.46,-33.46 GU2.11 35.46,-33.46 49.21,-47.21 ; GU2.18 49.21,-47.21 ; GU2.1 49.21,-47.21 ; v2(162,760) 162.16,759.84 U1.A1 ; U1.P1@192,350 v2(176.25,365.75) 192.39,381.89 U1.N1 ; U1.P2 v2(240.16,334.65) ; U1.R5 v2(303.15,334.65) U1.P5 ; U1.W6 v2(366.14,208.66) U1.V6 ; U1.N6 381.89,381.89 ; U1.L6 U1.L8 ; U1.J6 U1.J8 ; U1.W7 381.89,166.11 v1(382,166) ; U1.R7 v2(397.64,334.65) ; U1.P7 381.89,381.89 ; U1.V7@382,224 v2(397.75,239.75) ; U1.P8 U1.M8 381.89,381.89 ; U1.H8 U1.F8 ; U1.A10 476.38,784.38 v1(484,792) ; U1.P11 518,360.52 518,403.26 U1.M11 ; U1.P12 U1.M12 U1.M14 ; U1.K12 U1.K14 ; U1.F12 U1.H12 U1.H14 ; U1.E12 v2(555.12,649.61) ; U1.R14 U1.P14 ; v2(649.61,586.61) U1.G16 U1.G17 ; U1.A19 772,772 v1(772,796) ; -944,-466.17 -944,-432 -920,-408 R71.2 -852.2,-362.2 C70.1 -795.28,-374.02 -795.28,-513.89 U14.11
  Top Layer w8: GU2.18 49.21,-107.21 56,-114 v1(78,-114)
  Top Layer w10: v1(170,194) 168.91,192.91 U1.W1 ; U1.R2 v2(240.16,334.65) ; v1(1120,170) C91.1 ; C92.1 v1(1252,422)
  Top Layer w20: v1(-598,564.16) -597.08,565.08 Q4.1 ; v1(-520,-650) -519.31,-649.31 C68.1 ; v1(-500,-950) -499.92,-950.08 LD1.2 ; v1(-422,750) -421.52,749.52 Q1.1 ; v1(-354,366) -327.26,392.74 C71.1 ; v1(-336,194) -335.26,194.74 C82.1 ; v1(-320.98,569.02) Q5.1 ; v1(-268,-52) GC3.2 ; v1(-248,46) -248,10 GR5.2 ; v1(-220,-296) -218,-298 C74.1 ; C72.1 8,338 C73.1 v1(48,340) ; v1(-62,138) C83.1 ; C75.1 42.52,-424.52 v1(44,-426) ; v1(594,-144) 594.72,-143.28 Q3.1 ; v1(778,-418) 780.24,-415.76 Q2.1 ; v1(1158,-400) 1226,-400 S1.1
  Bottom Layer w7.87: v1(78,-114) 78.74,-113.26 GC1.2 ; v1(152,534) C81.2 ; v1(156,660) 160,664 C80.2 ; v2(162,760) 224,760 233.31,750.69 C57.2 ; C12.2 235.31,329.8 v2(240.16,334.65) ; C49.2 286.79,414 v2(303.15,397.64) ; v2(397.75,239.75) 415.91,239.75 C63.2 418.96,236.69 C79.2 518.35,236.69 C78.2 ; C58.2 C52.2 C61.2 C88.1 399.65,440.35 C62.2 418.27,440 v2(429.13,429.13) ; 454,399.31 458.35,403.65 C64.2 ; 454,401.65 454,422.5 v2(460.63,429.13) ; v2(460.63,523.62) 460.63,545.72 460,546.35 C56.2 564,546.35 C51.2 ; C50.2 484,764.69 v1(484,792) ; v2(523.62,492.13) 538.82,492.13 C86.1 546.69,460.69 C53.2 ; C87.1 608,608 v2(618.11,618.11) ; R9.1 618,303.04 v2(618.11,303.15) ; v2(649.61,586.61) 660.65,597.65 C77.2 C76.2 ; v2(649.61,649.61) 649.61,679.61 662.91,692.91 C60.2 ; 758,269.31 793.31,269.31 v1(794,270) ; C55.2 771.31,795.31 v1(772,796) ; GC4.2 v1(810,738) ; v1(830,378) 830.71,378.71 R11.2
  Bottom Layer w10: v1(170,194) 222,194 235.31,207.31 C13.2
  other v2: 492.13,429.13 523.62,429.13 429.13,460.63 460.63,460.63 492.13,460.63 523.62,460.63 429.13,492.13 460.63,492.13 492.13,492.13 429.13,523.62 492.13,523.62 523.62,523.62
IN_5V0: P12.3 P13.3 P16.3 P17.2 P18.2 P19.2 P20.2 P21.2 P22.2 R4.2 | length 4980.7
  Top Layer w10: R4.2 -1136.17,-262.17 -1070,-196 v1(-666,-196) -664,-194 P13.3 ; v1(-232,-630) 406,-630 454,-582 454,-504 495.8,-462.2 P12.3 P16.3 771.65,-600 980,-600 1082,-498 1082,-150 1136,-96 1136,-58 1230,36 1286,36 1318,68 1318,418.22 P20.2
  Top Layer w15: P20.2 P21.2 P22.2 P18.2 P17.2
  Bottom Layer w10: v1(-666,-196) v1(-232,-630)
MCU_GPIO_31: LD3.2 U1.U11 | length 662.2
  Top Layer w4: 492,170 492,240.03 U1.U11
  Top Layer w8: LD3.2 287.4,-108.6 492,96 492,170
MCU_GPIO_34: LD2.2 U1.U14 | length 660.5
  Top Layer w4: v1(556,72) 588,104 588,185.73 587.49,186.24 587.49,241.03 U1.U14
  Top Layer w6: v1(382,-248) v1@382.48,-248.48
  Top Layer w8: LD2.2 v1@382.48,-248.48
  Bottom Layer w6: v1(382,-248) 382,-102 v1(556,72)
MCU_GPIO_72: R20.1 U1.B16 | length 179.1
  Top Layer w4: U1.B16 650,743.7 650,836 R20.1@696,882
MCU_GPIO_84: R21.1 U1.A11 | length 92.9
  Top Layer w7.87: 507.87,786 523.87,802 v1(530,802)
  Top Layer w10: U1.A11 507.87,786
  Bottom Layer w7.87: R21.1 v1(530,802)
MCU_GPIO_94: GR6.1 Q1.3 U1.A3 | length 621.6
  Top Layer w6: 62,716 92,716 156,780 250,780 255.91,774.09 U1.A3
  Top Layer w10: Q1.3 -254,680 GR6.1 -164,680 -118,726 52,726 62,716
MCU_UART1_RXD: GR11.1 Q3.3 U1.V11 | length 333.7
  Top Layer w4: U1.V11 524,208.28 524,42.19 ; GR11.1 546,38.19
  Top Layer w10: GR11.1 630.74,14.19 Q3.3
MCU_UART1_TXD: P12.2 U1.W11 | length 621.1
  Top Layer w8: U1.W11 507.87,83.87 440,16 440,-102 472,-134 472,-302.71 P12.2
MCU_UART2_RXD: GR15.1 Q5.3 U1.E4 | length 518.8
  Top Layer w4: 142,618.98 272.53,618.98 U1.E4
  Top Layer w10: Q5.3 GR15.1 54.51,531.5 142,618.98
MCU_UART2_TXD: P13.2 U1.E3 | length 1003.1
  Top Layer w4: v1(86,650) 102,650 114,638 164,638 176,650 239.76,650 U1.E3
  Bottom Layer w10: P13.2 -564,354 -516,402 -286.98,402 -128.49,560.49 -3.51,560.49 v1(86,650)
NetC7_2: C7.2 R24.1 U1.G19 X1.1 | length 495.4
  Top Layer w4: R24.1@915.35,570.87 R24.1
  Top Layer w10: U1.G19 R24.1@915.35,570.87 ; R24.1 961.1,568.9 1027.56,502.44 X1.1 1036.62,380.2 C7.2@1110,380.2
NetC8_2: C8.2 U1.J19 X1.3 | length 419.2
  Top Layer w4: X1.3 917.32,279.02 C8.2
  Top Layer w8: U1.J19 840.13,507.87 862,486 862,318 869.48,310.52 X1.3
NetC48_2: C48.2 D2.2 L1.2 R3.2 R63.2 R66.2 R67.2 | length 1030.7
  Top Layer w7.87: R63.2 -746.27,-858.27 R3.2 -740.16,-851.84 -740.16,-726 -737.81,-728.35 L1.2 -600.39,-734.25 R67.2 -394.25,-734.25 -382,-722 -382,-430 -418.3,-393.7 D2.2
NetC65_2: C65.2 C66.2 D1.2 R4.1 R64.1 R65.1 R69.1 U14.3 | length 1215.2
  Top Layer w7.87: R4.1 D1.2 C66.2@-1018,-549.24 ; C66.2 -1016.91,-543.65 C65.2 -946,-545.65 v1(-946,-576) ; -965.88,-540.68 U14.3 ; R65.1 R64.1 v1(-408,-606)
  Bottom Layer w7.87: v1(-946,-576) -946,-634 -892,-688 -470,-688 -408,-626 v1(-408,-606)
NetC67_2: C67.2 R65.2 U14.9 | length 275.1
  Top Layer w7.87: U14.9 -539,-521 -530,-512 C67.2 R65.2
NetC68_2: C68.2 R64.2 U14.7 | length 325.8
  Top Layer w7.87: U14.7 -579.63,-560.37 -556,-584 -518,-584 C68.2 -476,-606 -468,-614 -468,-644 -462.69,-649.31 R64.2
NetC69_1: C69.1 R72.1 R73.1 U14.1 | length 420.5
  Top Layer w7.87: v1(-870,-316) -870,-250 -856.22,-236.22 R72.1 -777.56,-238.19 C69.1 ; v1(-856.65,-478) -833.33,-501.31 U14.1
  Bottom Layer w7.87: v1(-870,-316) -870,-464.65 v1(-856.65,-478)
NetC69_2: C69.2 C70.2 D2.1 L2.2 R5.1 R72.2 | length 551.9
  Top Layer w7.87: R72.2 -736.22,-354.33 C70.2 -716.54,-350.39 L2.2 -503.94,-350.39 D2.1 -314.27,-358.27 R5.1
NetC80_1: C80.1 R74.1 U1.F4 | length 118.6
  Top Layer w4: v2@271.04,586 U1.F4
  Bottom Layer w4: C80.1 R74.1 267.39,586.61 v2(271.65,586.61)
NetC81_1: C81.1 R75.1 U1.G4 | length 101.1
  Top Layer w4: v2@272.54,556 U1.G4
  Bottom Layer w4: C81.1 234,554 ; R75.1 234,554 ; v2(271.65,555.12) 235.12,555.12 234,554
NetD1_1: D1.1 POWER_5V_IN.2 | length 177.4
  Top Layer w7.87: POWER_5V_IN.2 D1.1@-1133.86,-667.72 ; D1.1@-1155.86,-669.72 D1.1
NetGC1_1: GC1.1 GU2.20 | length 91.9
  Top Layer w8: GU2.20 115.46,-33.46 v1(122,-40)
  Bottom Layer w8: GC1.1 85.28,-40 v1(122,-40)
NetGC3_1: GC3.1 GU2.10 | length 123.1
  Top Layer w7.87: GC3.1 -162,-52 -123.78,-13.78 GU2.10
NetGR1_1: GR1.1 GR3.1 GU2.23 | length 146
  Top Layer w7.87: GU2.23 124.41,25.59 153.75,-3.75 GR1.1 GR3.1
NetGR1_2: GR1.2 U1.T13 | length 506.2
  Top Layer w4: v2(556,272) 570.87,286.87 U1.T13
  Top Layer w7.87: GR1.2 v1@248,-3.75
  Bottom Layer w4: v1(248,-4) 326,-4 556,226 v2(556,272)
NetGR2_1: GR2.1 GR4.1 GU2.24 | length 136.3
  Top Layer w7.87: GU2.24 138.72,45.28 144.63,39.37 169.29,39.37 GR4.1@169.29,82.68
NetGR2_2: GR2.2 U1.U13 | length 513.5
  Top Layer w4: GR2.2 v1@398,38 ; v1(396,40) v1@398,38 ; v1@400,36 v1@398,38 ; v1(544,128) 556,140 556,175.86 555.99,241.03 U1.U13
  Bottom Layer w4: v1(396,40) 456,40 v1(544,128)
NetGR5_1: GR5.1 GU2.9 | length 108.1
  Top Layer w7.87: GR5.1 -183.91,5.91 GU2.9
NetGR7_1: GR7.1 Q1.2 | length 125.6
  Top Layer w10: GR7.1 -422.48,674.48 Q1.2
NetGR7_2: GR7.2 P15.1 | length 144.6
  Top Layer w10: P15.1 -658,728 GR7.2
NetGR9_1: GR9.1 GR10.2 Q2.3 | length 215.8
  Top Layer w10: GR10.2 860,-327.2 Q2.3 978.57,-329.15 GR9.1
NetGR10_1: GR10.1 Q3.2 | length 248.8
  Top Layer w10: Q3.2 672.83,-74 v1(710,-74) ; GR10.1 v1(800,-202)
  Bottom Layer w10: v1(710,-74) 800,-164 v1(800,-202)
NetGR12_1: GR12.1 Q4.2 | length 65.5
  Top Layer w10: Q4.2 -543.31,426.69 GR12.1
NetGR13_1: GR13.1 GR14.2 Q4.3 | length 220.5
  Top Layer w10: GR13.1 -430.63,608.63 -430.63,553.62 ; Q4.3 -430.63,553.62 ; GR14.2 -430.63,553.62
NetGR14_1: GR14.1 Q5.2 | length 90.7
  Top Layer w10: GR14.1 -365.79,493.98 Q5.2
NetGR16_1: GR16.1 Q2.2 | length 102.5
  Top Layer w10: Q2.2 899.47,-517.77 GR16.1
NetL1_1: L1.1 U14.6 | length 119.6
  Top Layer w7.87: U14.6 -688,-580.05 -657.82,-610.24 L1.1
NetL2_1: L2.1 U14.10 | length 120.7
  Top Layer w4: U14.10 -639.11,-501.31 L2.1
NetLD1_1: LD1.1 R67.1 | length 92.5
  Top Layer w7.87: LD1.1 R67.1
NetLD2_1: LD2.1 R13.1 | length 87
  Top Layer w7.87: R13.1@377.95,-477.87 382.48,-473.35 LD2.1
NetLD3_1: LD3.1 R14.1 | length 93.2
  Top Layer w7.87: R14.1 LD3.1
NetP3_1: P3.1 U1.W14 | length 1275.5
  Top Layer w4: v1(592,64) 592,88 602.36,98.36 U1.W14
  Bottom Layer w6: P3.1 424,-849.98 424,-170 592,-2 v1(592,64)
NetP3_2: P3.2 R9.2 U1.V14 | length 1252.7
  Top Layer w4: U1.V14 618,208.77 v1(618,82)
  Bottom Layer w6: P3.2 452,-777.98 452,-182 618,-16 v1(618,82) R9.2
NetP3_3: P3.3 U1.W13 | length 1613.6
  Top Layer w4: v1(562,104) 570.87,112.87 U1.W13
  Bottom Layer w6: v1(562,104) 350,-108 350,-398 390,-438 390,-956 480,-1046 618,-1046 636.22,-1027.78 P3.3
NetP3_7: P3.7 U1.W15 | length 1247.2
  Top Layer w4: U1.W15 633.86,132.14 v1(648,118)
  Bottom Layer w6: v1(648,118) 648,62 638,52 638,-98 712,-172 712,-594 786,-668 786,-911.98 P3.7
NetP3_9: P3.9 P3.11 U1.V15 | length 1420.1
  Top Layer w4: U1.V15 650,208.27 650,162 v1(672,140)
  Top Layer w7.87: P3.9 P3.11
  Bottom Layer w7.87: v1(672,140) 672,62 662,52 662,-70 748,-156 748,-568 884,-704 884,-909.98 P3.9
NetP3_13: P3.13 R1.2 | length 436.6
  Top Layer w7.87: P3.13 1191.8,-962.2 1242,-912 R1.2
NetP3_14: P3.14 R2.2 | length 274.2
  Top Layer w7.87: P3.14 1136.22,-771.78 1170,-738 R2.2
NetP4_3: P4.3 U1.B6 | length 1509.8
  Top Layer w4: 334.65,777.35 334.65,744.09 U1.B6
  Top Layer w6: v1(80,740) 138,798 314,798 334.65,777.35
  Bottom Layer w10: P4.3 -274,612 -212,674 14,674 v1(80,740)
NetP5_3: P5.3 U1.A6 | length 1496.8
  Top Layer w8: 36,760 82,760 136,814 324,814 350.39,787.61 U1.A6
  Top Layer w10: P5.3 -960,786 -154,786 -116,748 24,748 36,760
NetP6_3: P6.3 U1.D7 | length 1533.9
  Top Layer w4: v1(-20,640) 21.1,681.1 366.14,681.1 U1.D7
  Bottom Layer w10: P6.3 -946,412 -891,467 -319,467 -175,611 -49,611 v1(-20,640)
NetP7_3: P7.3 U1.C7 | length 1505.5
  Top Layer w4: v1(-52,642) -50,642 6,698 134,698 148.6,712.6 366.14,712.6 U1.C7
  Bottom Layer w10: P7.3 -314,512 -184,642 v1(-52,642)
NetP8_3: P8.3 U1.B7 | length 1525.1
  Top Layer w4: 348,816 366.14,797.86 366.14,744.09 U1.B7
  Top Layer w6: 108,816 124,832 332,832 348,816
  Top Layer w10: P8.3 -136,812 -104,780 72,780 108,816
NetP9_3: P9.3 U1.A7 | length 1599.1
  Top Layer w6: v1(334,856) 381.89,808.11 U1.A7
  Bottom Layer w10: P9.3 -700,914 -616,830 -202,830 -118,746 36,746 55,765 105,765 196,856 v1(334,856)
NetP10_3: P10.3 U1.D8 | length 1625.8
  Top Layer w4: v2(397.64,681.1) U1.D8
  Bottom Layer w10: P10.3 -944,312 -827,429 -317,429 -157,589 -33,589 56,678 120,678 146,704 374.74,704 v2(397.64,681.1)
NetP11_3: P11.3 U1.C8 | length 1738.1
  Top Layer w4: 397.64,776 397.64,712.6 U1.C8
  Top Layer w10: v1(372,866) 397.64,840.36 397.64,776
  Bottom Layer w10: P11.3 -730,1014 -588,872 -200,872 -108,780 30,780 40,790 92,790 184,882 356,882 v1(372,866)
NetP16_1: P16.1 U1.U17 | length 592.3
  Top Layer w4: 680,168 680,186.3 680.23,186.52 680.23,239.28 U1.U17
  Top Layer w10: P16.1 738,-158.06 738,110 680,168
NetP16_2: P16.2 U1.V17 | length 670
  Top Layer w4: U1.V17 712,209.26 712,170 734,148
  Top Layer w10: P16.2 740,-256.06 740,-210 766,-184 766,116 734,148
NetP17_3: P17.3 U1.B15 | length 716.3
  Top Layer w4: 618,888 618,744.2 U1.B15
  Top Layer w8: 618,888 761.5,1031.5 P17.3
NetP18_3: P18.3 U1.A15 | length 603.5
  Top Layer w8: U1.A15 633.86,859.86 703.13,929.13 P18.3
NetP19_3: P19.3 U1.C16 | length 454.7
  Top Layer w4: U1.C16 681.1,712.6 834,712.6
  Top Layer w8: 834,712.6 847.4,726 P19.3
NetP20_3: P20.3 U1.D16 | length 500.4
  Top Layer w4: U1.D16 681.1,649.61 784,649.61
  Top Layer w8: 784,649.61 817.61,616 1020.22,616 P20.3
NetP21_3: P21.3 U1.C17 | length 441.2
  Top Layer w4: U1.C17 712.6,681.1 786,681.1
  Top Layer w8: 786,681.1 1053.54,681.1 P21.3
NetP22_3: P22.3 U1.A16 | length 483.6
  Top Layer w8: U1.A16 665.35,781.35 710.77,826.77 P22.3
NetR11_1: R11.1 R12.2 U1.J18 | length 147.8
  Top Layer w4: U1.J18 744.09,492.13 779.87,492.13 v1(786,486)
  Bottom Layer w4: v1(786,486) 787.4,484.6 R12.2 R11.1
NetR63_1: R63.1 U14.4 | length 373.6
  Top Layer w7.87: R63.1 -913.73,-858.27 -929.13,-842.87 -929.13,-740.16 -887.95,-698.98 -887.95,-608.43 -839.9,-560.37 U14.4
NetR66_1: R66.1 R68.2 | length 104
  Top Layer w7.87: R68.2 -796.96,-814.96 -783.31,-801.31 R66.1
NetR68_1: R68.1 R70.1 U14.5 | length 270.5
  Top Layer w7.87: R68.1 R70.1 -897.64,-736.22 -870.08,-708.66 -870.08,-618.11 -832.02,-580.05 U14.5
NetR69_2: R69.2 R71.1 U14.2 | length 131.7
  Top Layer w7.87: R71.1 R69.2 -874.54,-498.35 v3(-857.95,-514.94) -857.95,-515.43 -858.27,-515.75 -853.02,-521 U14.2
OSC_GND: C7.1 C8.1 R24.2 U1.H18 U1.H19 X1.2 X1.4 | length 504.1
  Top Layer w8: U1.H18 U1.H19 876,539.37 889.78,525.59 R24.2
  Top Layer w10: X1.2 R24.2 ; C8.1 1027.56,275.09 X1.4 1084.17,310.52 C7.1
UART1_RXD: GR16.2 P12.1 | length 465.5
  Top Layer w10: P12.1 584,-314.71 584,-402 596,-414 672,-414 776.13,-518.13 GR16.2
UART2_RXD: GR12.2 P13.1 | length 122.6
  Top Layer w10: GR12.2 -481.81,327.81 P13.1
VDD_1V2: C74.2 L4.1 R5.2 | length 212.5
  Top Layer w7.87: R5.2 -110,-418 L4.1
VDD_3V3: C71.2 C78.1 C79.1 C82.2 C91.2 GC2.2 GR3.2 GR4.2 GR6.2 GR8.2 GR9.2 GR11.2 GR13.2 GR15.2 GU2.8 GU2.13 L3.1 L5.1 L6.1 P3.5 P15.2 R1.1 R2.1 R3.1 R12.1 R13.2 R14.2 R20.2 R21.2 U1.R11 U1.R12 | length 1767.4
  Top Layer w4: v2(492.13,303.15) U1.R11 ; v2(523.62,303.15) U1.R12
  Top Layer w8: v1(-124,40) -109.59,25.59 GU2.8 ; GC2.2 -49.21,-149.21 GU2.13 ; v1(234,-550) 235.81,-548.19 R14.2 287.59,-548 R13.2 ; GR11.2 522,-140 v1(548,-166)
  Top Layer w10: C82.2 -201.55,116 L5.1 ; C71.2 -175.55,314 L3.1 ; v1(1256,116) C91.2 1256,279.1 L6.1
  Top Layer w20: R3.1 v1(-630,-852) ; v1(-586,654) GR13.2 ; v1(-330,312) -328,314 C71.2 ; v1(-326,114) -324,116 C82.2 ; GR6.2 v1(-164,740) ; GR15.2 v1(-90.55,697.45) ; v1(212.6,-78.6) GR3.2 ; GR4.2 215.65,111.65 v1(216,112) ; R20.2 v1(780,880) ; GR9.2 1030.52,-398.52 v1(1032,-400) ; R2.1 R1.1 1296,-542 v1(1298,-544)
  Bottom Layer w8: v1(-124,40) -50,-34 v1(-50,-126) ; R21.2 573.31,803.31 v1(574,804) ; v1(830,478) 830.71,477.29 R12.1 ; GR8.2 882.69,653.31 v1(884,652)
VDD_MCU_1V2: C75.2 C84.2 C85.2 C86.2 C87.2 C88.2 C89.2 C90.2 L4.2 U1.E9 U1.E11 U1.F9 U1.F11 U1.G14 U1.G15 U1.J14 U1.J15 U1.K5 U1.K6 U1.P10 U1.P13 U1.R10 U1.R13 | length 738.1
  Top Layer w4: U1.F9 v2(460.63,618.11) ; U1.R10 U1.P10 ; U1.E11 v2(523.62,618.11) ; U1.R13 v2(555.12,334.65) U1.P13 ; v2(618.25,492.25) U1.J15@634,508 ; U1.G15 v2(649.61,555.12)
  Top Layer w7.87: U1.E9 v2(460.63,618.11) ; U1.P10 v2(492.13,366.14) ; U1.F11 v2(523.62,618.11)
  Top Layer w10: L4.2 C75.2@-4.06,-355.1 ; v1(-4,-318) -4.06,-318.06 C75.2@-4.06,-355.1 ; v1(34,-360) -1.54,-360 C75.2 C75.2@-4.06,-355.1 ; U1.K5 v2(334.65,492.13) U1.K6 ; U1.J14 602.63,507.87 v2(618.25,492.25) ; U1.G14 U1.G15
  Bottom Layer w4: C84.2 448,605.48 v2(460.63,618.11) ; v2(523.62,618.11) 532,609.73 C85.2@532,593.65
  Bottom Layer w10: v2(334.65,492.13) 344.77,482 C88.2 ; C90.2 484.33,358.35 v2(492.13,366.14) ; C89.2 534,355.76 v2(555.12,334.65) ; C86.2 610.5,500 v2(618.25,492.25) ; C87.2 644.49,550 v2(649.61,555.12)
VDD_MCU_3V3: C49.1 C50.1 C51.1 C52.1 C53.1 C54.1 C55.1 C56.1 C57.1 C58.1 C59.1 C60.1 C61.1 C62.1 C63.1 C64.1 C72.2 C73.2 L3.2 R74.2 R75.2 U1.A9 U1.A18 U1.B1 U1.E7 U1.E10 U1.E13 U1.E16 U1.F7 U1.F10 U1.F13 U1.F16 U1.G5 U1.G6 U1.H5 U1.H6 U1.L14 U1.L15 U1.M1 U1.M5 U1.M6 U1.N14 U1.N15 U1.P9 U1.R9 U1.V19 U1.W8 | length 1739.6
  Top Layer w4: v2(144,730) 145.65,728.35 U1.B1 ; v2(334.65,429.13) U1.M6 ; v2(335.29,584.24) 337.02,584.24 U1.G6 ; v2@335.91,584.85 333.78,586.98 v2@337.72,586.98 ; v2(366.14,618.11) U1.F7 ; U1.N14 v2(618.11,366.14) ; v2(618.11,460.63) U1.L15 ; v2(649.61,618.11) U1.F16
  Top Layer w7.87: v2(429.13,334.65) U1.P9 ; v2(744.09,240.16) U1.V19
  Top Layer w10: L3.2 2.45,394.45 C73.2 v1(56,402) ; v1(158,414) 192.3,414 U1.M1 ; U1.M5 v2(334.65,429.13) ; U1.H5 318.9,540.9 v2(334,556) 350.39,539.61 U1.H6 ; U1.G5 321.92,570.87 v2(335.29,584.24) ; U1.G6@348.87,570.87 U1.G6 ; v2(366.14,618.11) U1.E7 ; U1.W8 414,192.3 v1(414,148) ; v2(429.13,334.65) U1.R9 ; v1(444,796.24) 444.88,797.12 U1.A9 ; U1.F10 479.63,602.36 479.63,630.61 U1.E10 v2(492.13,649.61) ; U1.F13 v2(555.12,618.11) U1.E13 ; U1.L14 v2(618.11,460.63) ; v2(618.11,366.14) U1.N15 ; v2(649.61,618.11) U1.E16 ; v1(728,792) 728.35,791.65 U1.A18
  Bottom Layer w4: R75.2 R74.2
  Bottom Layer w10: v2(144,730) 146,728 C57.1 ; v1(152,576) R75.2 ; v1(158,414) C49.1 ; v2@333.29,586.24 v2(335.29,584.24) ; v2(334.65,429.13) 345.51,440 C62.1 ; C52.1@356,562 340,562 v2(334,556) 334,530 344,520 C61.1 ; C58.1 366.14,607.8 v2(366.14,618.11) ; v1(414,148) C63.1@414,194 ; C59.1 428,335.78 v2(429.13,334.65) ; C50.1 444,768 v1(444,796.24) ; C56.1 488,645.48 v2(492.13,649.61) ; v2(555.12,618.11) 568,605.23 C51.1 ; C64.1 612.32,360.35 v2(618.11,366.14) ; C53.1 617.48,460 v2(618.11,460.63) ; v2(649.61,618.11) C60.1 711.61,649.61 728,666 C55.1 v1(728,792) ; v2(744.09,240.16) 757.91,226.35 C54.1 ; 758,226 C54.1@760,224
VDDA_MCU_3V3: C12.1 C13.1 C83.2 L5.2 U1.P6 U1.R1 U1.R6 U1.V1 U1.V5 U1.W5 | length 380.3
  Top Layer w4: v2(303.15,208.66) U1.V5
  Top Layer w7.87: v2(334.65,303.15) U1.R6
  Top Layer w10: L5.2 -146.45,240 C83.2 v1(-14,240) ; v1(160,224) 192.5,224 U1.V1 ; v1(160,318) 160.9,318.9 U1.R1 ; v2(303.15,208.66) U1.W5 ; U1.R6 U1.P6
  Bottom Layer w10: v1(160,224) C13.1 ; v1(160,318) C12.1
VDDOSC_MCU_3V3: C76.1 C77.1 C92.2 L6.2 U1.H16 U1.H17 | length 775.8
  Top Layer w4: U1.H16 v2(681.1,523.62) ; U1.H17 v2(712.6,523.62)
  Top Layer w10: v1(1070,448) 1122,448 C92.2 L6.2
  Bottom Layer w10: C77.1 682,524.52 v2(681.1,523.62) v2(712.6,523.62) ; C76.1 712.6,546.94 v2(712.6,523.62) ; v1(1070,448) 994.38,523.62 v2(712.6,523.62)
X\R\S\: GC4.1 GR8.1 S1.2 U1.F19 | length 1046.2
  Top Layer w4: U1.F19 v1(788.36,602.36) v1@793.64,602.36
  Top Layer w10: v1(1228,-16) 1230,-18 S1.2
  Bottom Layer w10: v1(788.36,602.36) 796,610 GC4.1 GR8.1 952,610 1228,334 v1(1228,-16)
pads on no net: GU2.2 GU2.3 GU2.4 GU2.5 GU2.6 GU2.7 GU2.12 GU2.14 GU2.15 GU2.16 GU2.17 GU2.19 GU2.21 GU2.22 P3.6 P4.2 P5.2 P6.2 P7.2 P8.2 P9.2 P10.2 P11.2 U1.A2 U1.A4 U1.A5 U1.A8 U1.A12 U1.A13 U1.A14 U1.A17 U1.B2 U1.B3 U1.B4 U1.B5 U1.B8 U1.B9 U1.B10 U1.B11 U1.B12 U1.B13 U1.B14 U1.B17 U1.B18 U1.B19 U1.C1 U1.C2 U1.C3 U1.C4 U1.C5 U1.C6 U1.C9 U1.C10 U1.C11 U1.C12 U1.C13 U1.C14 U1.C15 U1.C18 U1.C19 U1.D1 U1.D2 U1.D3 U1.D4 U1.D5 U1.D6 U1.D9 U1.D10 U1.D11 U1.D12 U1.D13 U1.D14 U1.D15 U1.D17 U1.D18 U1.D19 U1.E1 U1.E2 U1.E17 U1.E18 U1.E19 U1.F1 U1.F2 U1.F3 U1.F17 U1.F18 U1.G1 U1.G2 U1.G3 U1.G18 U1.H1 U1.H2 U1.H3 U1.H4 U1.J1 U1.J2 U1.J3 U1.J4 U1.J16 U1.J17 U1.K1 U1.K2 U1.K3 U1.K4 U1.K16 U1.K17 U1.K18 U1.K19 U1.L1 U1.L2 U1.L3 U1.L4 U1.L16 U1.L17 U1.L19 U1.M2 U1.M3 U1.M4 U1.M16 U1.M17 U1.M18 U1.M19 U1.N2 U1.N3 U1.N4 U1.N16 U1.N17 U1.N18 U1.N19 U1.P3 U1.P4 U1.P16 U1.P17 U1.P18 U1.P19 U1.R3 U1.R4 U1.R16 U1.R17 U1.R18 U1.R19 U1.T1 U1.T2 U1.T3 U1.T4 U1.T5 U1.T6 U1.T7 U1.T8 U1.T9 U1.T10 U1.T11 U1.T12 U1.T14 U1.T15 U1.T16 U1.T17 U1.T18 U1.T19 U1.U1 U1.U2 U1.U3 U1.U4 U1.U5 U1.U6 U1.U7 U1.U8 U1.U9 U1.U10 U1.U12 U1.U15 U1.U16 U1.U18 U1.U19 U1.V2 U1.V3 U1.V4 U1.V8 U1.V9 U1.V10 U1.V12 U1.V13 U1.V16 U1.V18 U1.W2 U1.W3 U1.W4 U1.W9 U1.W10 U1.W12 U1.W16 U1.W17 U1.W18

## Polygon pours and split planes (outlines as drawn)
GND on Top Layer "Top Layer-No Net" (solid, remove dead copper, pour order 4): -1082,-484 -1082,-388 -1040,-346 -1036,-342 -818,-342 -794,-342 -782,-354 -786,-358 -786,-388 -786,-396 -756,-426 -742,-440 -742,-536 -742,-630 -750,-638 -762,-650 -778,-650 -795.28,-667.28 -795.28,-676 -795.28,-729.28 -806,-740 -838,-740 -850,-728 -850,-636 -834,-620 -826,-612 -812,-612 -800,-600 -800,-552 -800,-484 -818,-466 -834,-450 -860,-450 -868,-442 -868,-432 -868,-424 -874,-418 -916,-418 -928,-430 -932,-434 -932,-482 -932,-498 -944,-510 -960,-510 -968,-502 -968,-488 -976,-480 -980,-484 -1082,-484
GND on Internal Plane 1 (split plane): 1357.86,-1082.27 -1357.86,-1082.27 -1357.86,1082.27 1357.86,1082.27
VDD_MCU_3V3 on Internal Plane 2 (split plane): 506.9,867.89 506.9,794 506.9,780 507.29,778.05 508.4,776.4 530.4,754.4 532.05,753.29 534,752.9 681.89,752.9 726.9,707.89 726.9,408 727.29,406.05 728.4,404.4 802.4,330.4 814.9,317.89 814.9,258 814.9,230.11 796.4,211.6 789.89,205.1 707.1,205.1 707.1,252 707.1,310 706.71,311.95 705.6,313.6 697.6,321.6 681.6,337.6 679.95,338.71 678,339.1 602.11,339.1 591.1,350.11 591.1,451.89 610.11,470.9 630,470.9 631.95,471.29 633.6,472.4 639.6,478.4 640.71,480.05 641.1,482 641.1,508 640.71,509.95 639.6,511.6 569.6,581.6 547.1,604.11 547.1,634 546.71,635.95 545.6,637.6 539.6,643.6 537.95,644.71 536,645.1 516,645.1 514.05,644.71 512.4,643.6 499.89,631.1 486.11,631.1 473.6,643.6 471.95,644.71 470,645.1 426,645.1 424.05,644.71 422.4,643.6 404.4,625.6 403.29,623.95 402.9,622 402.9,606 402.9,586.11 347.89,531.1 332,531.1 330.05,530.71 328.4,529.6 318.4,519.61 318.4,519.6 299.89,501.1 272,501.1 270.05,500.71 268.4,499.6 267.29,497.95 266.9,496 267.29,494.05 268.4,492.4 270.05,491.29 272,490.9 302,490.9 303.95,491.29 305.6,492.4 306.9,493.69 306.9,476 307.29,474.05 308.4,472.4 322.4,458.4 324.05,457.29 326,456.9 345.89,456.9 346.4,456.4 360.9,441.89 360.9,434 361.29,432.05 362.4,430.4 408.4,384.4 410.05,383.29 412,382.9 441.89,382.9 450.9,373.89 450.9,332.11 441.89,323.1 382.11,323.1 347.6,357.6 345.95,358.71 344,359.1 98,359.1 96.05,358.71 94.4,357.6 78.4,341.61 78.4,341.6 31.89,295.1 -164,295.1 -165.95,294.71 -167.6,293.6 -188.9,272.31 -188.9,529.89 -161.89,556.9 -62.11,556.9 -61.6,556.4 -59.95,555.29 -58,554.9 -32,554.9 -30.05,555.29 -28.4,556.4 45.6,630.4 46.71,632.05 47.1,634 47.1,747.89 105.6,806.4 184.11,884.9 489.89,884.9
VDD_MCU_1V2 on Internal Plane 2 (split plane): 536.9,631.89 536.9,602 537.29,600.05 538.4,598.4 562.4,574.4 630.9,505.89 630.9,484.11 627.89,481.1 608,481.1 606.05,480.71 604.4,479.6 582.4,457.6 581.29,455.95 580.9,454 580.9,366 580.9,348 580.9,346 581.29,344.05 582.4,342.4 584.05,341.29 585.86,340.93 596.4,330.4 598.05,329.29 600,328.9 675.89,328.9 690.4,314.4 696.9,307.89 696.9,252 696.9,186 696.9,40.11 670.4,13.61 670.4,13.6 477.89,-178.9 342,-178.9 340.05,-179.29 338.4,-180.4 133.89,-384.9 -143.89,-384.9 -156.4,-372.4 -160.9,-367.89 -160.9,-288.11 -133.89,-261.1 -16,-261.1 -14.05,-260.71 -12.4,-259.6 39.6,-207.6 220.11,-27.1 384,-27.1 385.95,-26.71 387.6,-25.6 487.6,74.4 488.71,76.05 489.1,78 489.1,238.9 504,238.9 505.95,239.29 507.6,240.4 539.6,272.4 549.6,282.4 550.71,284.05 551.1,286 551.1,290 551.1,310 550.71,311.95 549.6,313.6 529.6,333.6 527.95,334.71 526,335.1 461.1,335.1 461.1,376 460.71,377.95 459.6,379.6 447.6,391.6 445.95,392.71 444,393.1 414.11,393.1 371.1,436.11 371.1,444 370.71,445.95 369.6,447.6 353.6,463.6 351.6,465.6 349.95,466.71 348,467.1 328.11,467.1 317.1,478.11 317.1,503.89 325.6,512.4 325.61,512.4 334.11,520.9 350,520.9 351.95,521.29 353.6,522.4 411.6,580.4 412.71,582.05 413.1,584 413.1,606 413.1,619.89 428.11,634.9 467.89,634.9 480.4,622.4 482.05,621.29 484,620.9 502,620.9 503.95,621.29 505.6,622.4 518.11,634.9 533.89,634.9
VDDA_MCU_3V3 on Internal Plane 2 (split plane): 374.9,315.89 374.9,252.11 372.4,249.61 372.4,249.6 289.89,167.1 -169.89,167.1 -188.9,186.11 -188.9,257.89 -161.89,284.9 34,284.9 35.95,285.29 37.6,286.4 85.6,334.4 85.61,334.4 100.11,348.9 341.89,348.9
VDD_3V3 on Internal Plane 2 (split plane): 1357.86,-1082.27 -1357.86,-1082.27 -1357.86,1082.27 1357.86,1082.27

## Keep-outs
Keep-Out Layer:
  circle w10: c0,-944.88 r68.9
  circle w10: c964.57,0 r68.9
  circle w10: c-964.57,0 r68.9
  circle w10: c0,944.88 r68.9
  lines w7.87: -1377.95,-1102.36 1377.95,-1102.36 1377.95,1102.36 -1377.95,1102.36 -1377.95,-1102.36

## Other copper
Top Layer:
  rectangle net GND: 413.39,413.39 539.37,539.37
Internal Plane 2 (plane layer: these items are gaps in the copper):
  lines w10: 272,496 302,496 322,516 332,526 350,526 408,584 408,606 408,622 426,640 470,640 484,626 502,626 516,640 536,640 542,634 542,602 566,578 636,508 636,482 630,476 608,476 586,454 586,346 ; 312,506 312,476 326,462 348,462 350,460 366,444 366,434 412,388 444,388 456,376 456,330 ; 586,366 586,348 600,334 630,334 678,334 694,318 702,310 702,252 702,186 702,38 674,10 480,-184 342,-184 136,-390 42,-390 -146,-390 -160,-376 -166,-370 -166,-286 -136,-256 -106,-256 -16,-256 36,-204 218,-22 384,-22 484,78 484,244 504,244 536,276 546,286 546,290 546,310 526,330 456,330 ; 702,200 792,200 800,208 820,228 820,258 820,320 806,334 732,408 732,710 684,758 534,758 512,780 512,794 512,870 492,890 360,890 182,890 102,810 42,750 42,634 -32,560 -58,560 -60,562 -164,562 -194,532 -194,260 ; -194,260 -194,184 -172,162 236,162 292,162 376,246 380,250 380,318 ; -194,260 -164,290 34,290 82,338 98,354 210,354 344,354 380,318 ; 380,318 410,318 444,318 456,330

## Silkscreen, mask and mechanical layers (free items; w line width, h text height)
Top Overlay:
  circle w10: c964.57,0 r137.8
  circle w10: c0,944.88 r137.8
  circle w10: c0,-944.88 r137.8
  circle w10: c-964.57,3.94 r137.8
Mechanical 1:
  lines w7.87: -602.36,0 893.7,0 897.64,3.94 ; 0,-901.57 0,598.43

## Text inside footprints (layer, text, board x,y; h text height)
X1: Top Overlay "1" at 1094.49,424.69 h39.37 r180